# EAGLE board CPU-001 (EAGLE 9.5.2)
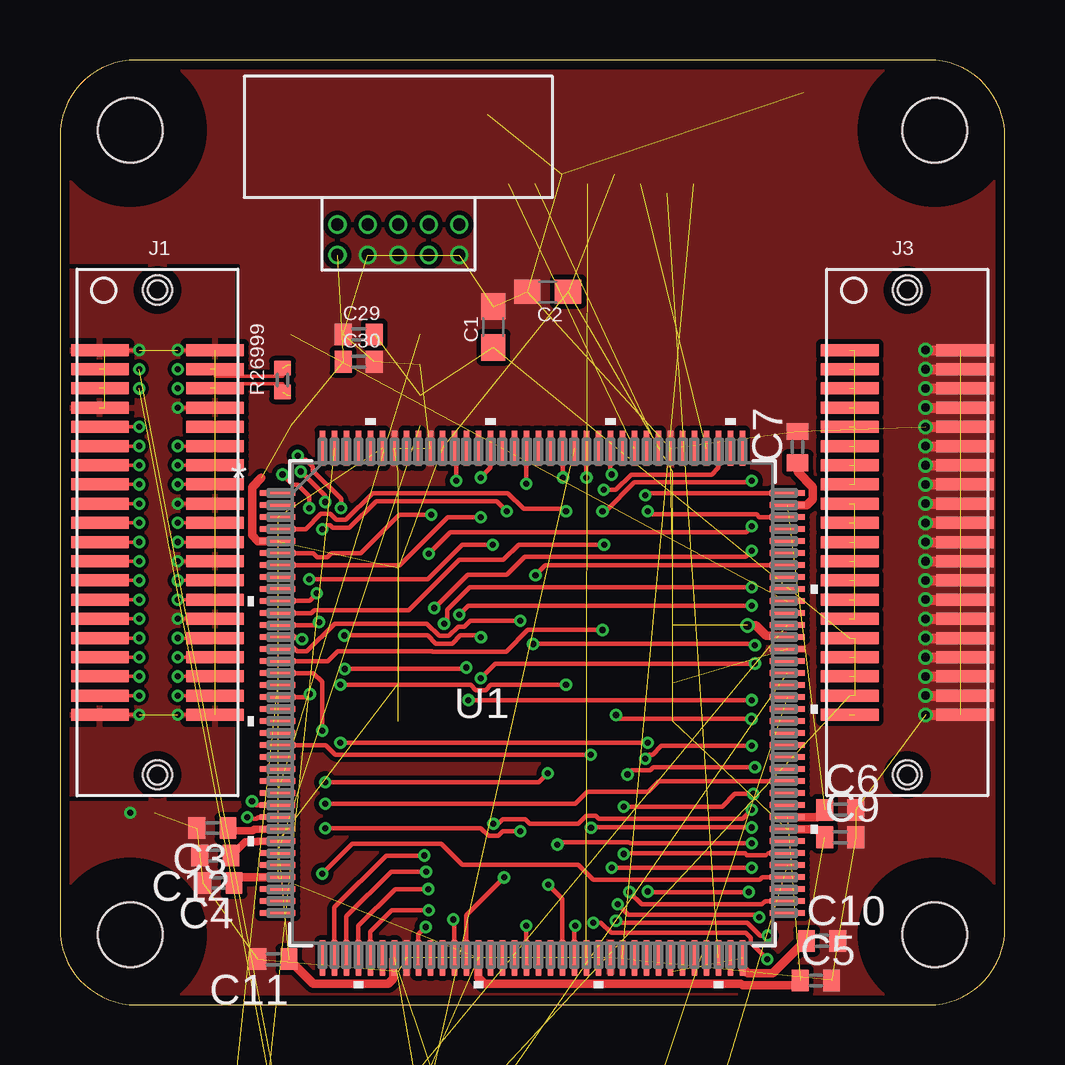
[diagram p0: board, top side]
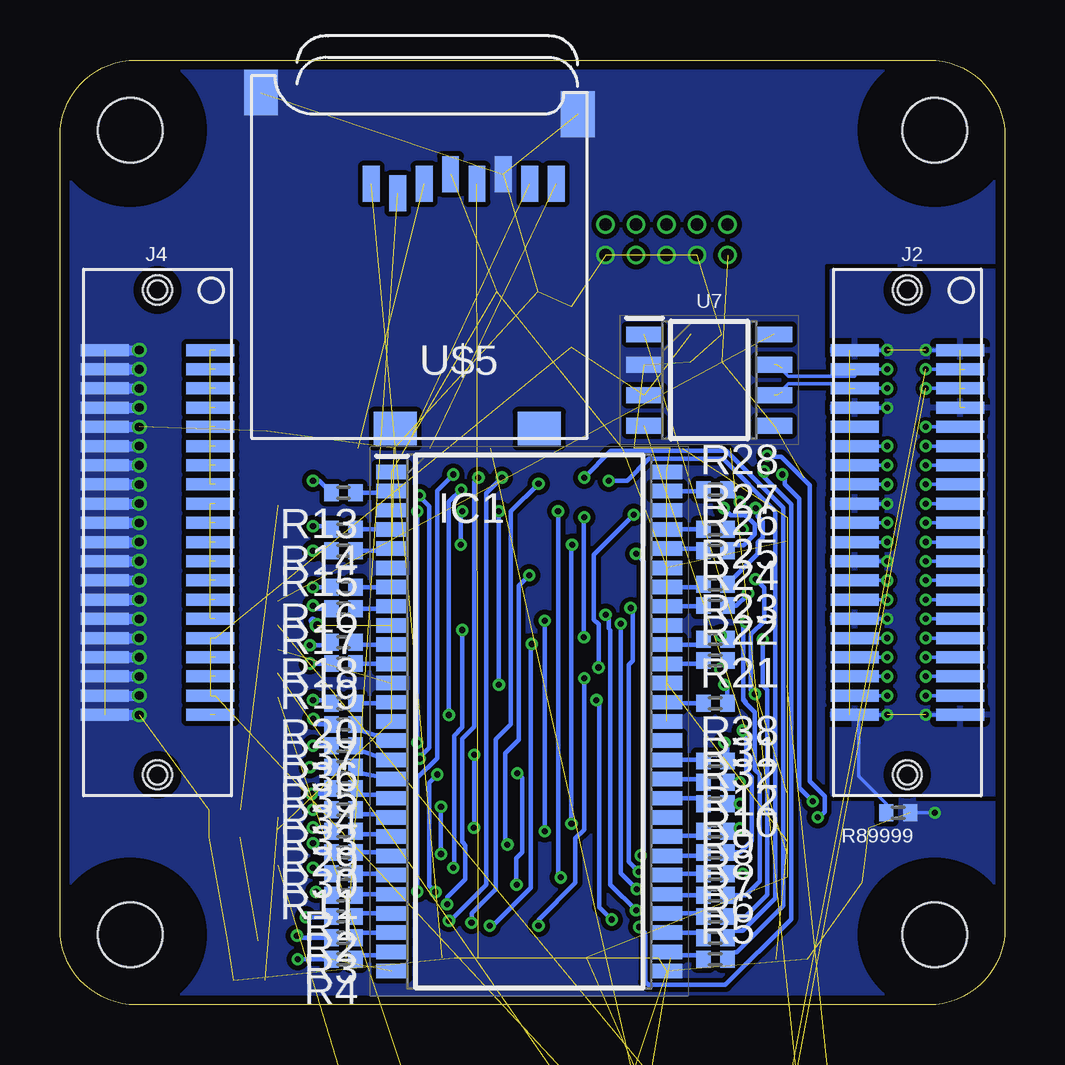
[diagram p1: board, bottom side, seen from below]

Size 39.37 x 39.37 mm. Coordinates in mm from the lower left corner, seen from the top.
Outline: 0,36.2 0,3.17 arc90 3.17,0 36.2,0 arc90 39.37,3.17 39.37,36.2 arc90 36.2,39.37 3.17,39.37 arc90 0,36.2
Copper layers (1*16): Top 0.035559375mm / dielectric 1.6mm / Bottom 0.035559375mm
Design rules "oshpark-2layer *": minimum track width 6mil, minimum drill 10mil, track to track 6mil, track to pad 6mil, pad to pad 6mil, via to via 6mil, smd to smd 0mil, copper to edge 15mil, drill to drill 6mil, minimum pad ring 5mil, minimum via ring 5mil, stop-mask expansion 2.5mil, vias tented up to drill 10mil, thermal gap 10mil
Holes 2.69 mm at 2.92,36.45 36.45,36.45 36.45,2.92 2.92,2.92
tRestrict: area 33.5,0 to 39.4,5.8; area 0,0 to 5.8,5.8; area 0,33.5 to 5.8,39.4; area 33.5,33.5 to 39.4,39.4
bRestrict: area 33.5,0 to 39.4,5.8; area 0,0 to 5.8,5.8; area 0,33.5 to 5.8,39.4; area 33.5,33.5 to 39.4,39.4
vRestrict: area 31.7,0 to 38.1,6.3; area 0,0 to 6.3,6.3; area 0,31.7 to 6.3,38.1; area 31.7,31.7 to 38.1,38.1

## Footprints (pad centres in the part's own frame; a part is rotated, then mirrored left to right if it is on the bottom)
C0603 = smd 1.1 x 1: 1 -0.85,0; 2 0.85,0
C0402 = smd 0.7 x 0.9: 1 -0.65,0; 2 0.65,0
C0805 = smd 1.3 x 1.5: 1 -0.95,0; 2 0.95,0
0603-POLAR = smd 1.1 x 1: + 0.85,0; - -0.85,0
SOP80P1176X120-54N = smd 1.295 x 0.6: 1 -5.728,10.4; 2 -5.728,9.6; 3 -5.728,8.8; 4 -5.728,8; 5 -5.728,7.2; 6 -5.728,6.4; 7 -5.728,5.6; 8 -5.728,4.8; 9 -5.728,4; 10 -5.728,3.2; 11 -5.728,2.4; 12 -5.728,1.6; 13 -5.728,0.8; 14 -5.728,0; 15 -5.728,-0.8; 16 -5.728,-1.6; 17 -5.728,-2.4; 18 -5.728,-3.2; 19 -5.728,-4; 20 -5.728,-4.8; 21 -5.728,-5.6; 22 -5.728,-6.4; 23 -5.728,-7.2; 24 -5.728,-8; 25 -5.728,-8.8; 26 -5.728,-9.6; 27 -5.728,-10.4; 28 5.728,-10.4; 29 5.728,-9.6; 30 5.728,-8.8; 31 5.728,-8; 32 5.728,-7.2; 33 5.728,-6.4; 34 5.728,-5.6; 35 5.728,-4.8; 36 5.728,-4; 37 5.728,-3.2; 38 5.728,-2.4; 39 5.728,-1.6; 40 5.728,-0.8; 41 5.728,0; 42 5.728,0.8; 43 5.728,1.6; 44 5.728,2.4; 45 5.728,3.2; 46 5.728,4; 47 5.728,4.8; 48 5.728,5.6; 49 5.728,6.4; 50 5.728,7.2; 51 5.728,8; 52 5.728,8.8; 53 5.728,9.6; 54 5.728,10.4
SOT223 = smd 1.5 x 2: 1 -2.3,-3.15; 2 0,-3.15; 3 2.3,-3.15 | smd 3.8 x 2: 4 0,3.15
SOT95P280X100-5N = smd 1.05 x 0.55: 1 -1.3,0.95; 2 -1.3,0; 3 -1.3,-0.95; 4 1.3,-0.95; 5 1.3,0.95
10144517-042802LF = smd 0.5 x 2.4: 1 7.6,2.4; 2 7.6,-2.4; 3 6.8,2.4; 4 6.8,-2.4; 5 6,2.4; 6 6,-2.4; 7 5.2,2.4; 8 5.2,-2.4; 9 4.4,2.4; 10 4.4,-2.4; 11 3.6,2.4; 12 3.6,-2.4; 13 2.8,2.4; 14 2.8,-2.4; 15 2,2.4; 16 2,-2.4; 17 1.2,2.4; 18 1.2,-2.4; 19 0.4,2.4; 20 0.4,-2.4; 21 -0.4,2.4; 22 -0.4,-2.4; 23 -1.2,2.4; 24 -1.2,-2.4; 25 -2,2.4; 26 -2,-2.4; 27 -2.8,2.4; 28 -2.8,-2.4; 29 -3.6,2.4; 30 -3.6,-2.4; 31 -4.4,2.4; 32 -4.4,-2.4; 33 -5.2,2.4; 34 -5.2,-2.4; 35 -6,2.4; 36 -6,-2.4; 37 -6.8,2.4; 38 -6.8,-2.4; 39 -7.6,2.4; 40 -7.6,-2.4 | hole 1.2: 10.1,0 | hole 0.8: -10.1,0
10144518-041802LF = smd 0.5 x 2: 1 -7.6,2.2; 2 -7.6,-2.2; 3 -6.8,2.2; 4 -6.8,-2.2; 5 -6,2.2; 6 -6,-2.2; 7 -5.2,2.2; 8 -5.2,-2.2; 9 -4.4,2.2; 10 -4.4,-2.2; 11 -3.6,2.2; 12 -3.6,-2.2; 13 -2.8,2.2; 14 -2.8,-2.2; 15 -2,2.2; 16 -2,-2.2; 17 -1.2,2.2; 18 -1.2,-2.2; 19 -0.4,2.2; 20 -0.4,-2.2; 21 0.4,2.2; 22 0.4,-2.2; 23 1.2,2.2; 24 1.2,-2.2; 25 2,2.2; 26 2,-2.2; 27 2.8,2.2; 28 2.8,-2.2; 29 3.6,2.2; 30 3.6,-2.2; 31 4.4,2.2; 32 4.4,-2.2; 33 5.2,2.2; 34 5.2,-2.2; 35 6,2.2; 36 6,-2.2; 37 6.8,2.2; 38 6.8,-2.2; 39 7.6,2.2; 40 7.6,-2.2 | hole 1.2: 10.1,0 | hole 0.8: -10.1,0
2X5_RIGHT = drill 0.508: 1 2.54,0; 2 2.54,-1.27; 3 1.27,0; 4 1.27,-1.27; 5 0,0; 6 0,-1.27; 7 -1.27,0; 8 -1.27,-1.27; 9 -2.54,0; 10 -2.54,-1.27
0603 = smd 1.1 x 1: 1 -0.85,0; 2 0.85,0
R0402 = smd 0.6 x 0.7: 1 -0.5,0; 2 0.5,0
LQFP144_20X20MC = smd 1.473 x 0.229: 1 -10.617,8.75; 2 -10.617,8.25; 3 -10.617,7.75; 4 -10.617,7.25; 5 -10.617,6.75; 6 -10.617,6.25; 7 -10.617,5.75; 8 -10.617,5.25; 9 -10.617,4.75; 10 -10.617,4.25; 11 -10.617,3.75; 12 -10.617,3.25; 13 -10.617,2.75; 14 -10.617,2.25; 15 -10.617,1.75; 16 -10.617,1.25; 17 -10.617,0.75; 18 -10.617,0.25; 19 -10.617,-0.25; 20 -10.617,-0.75; 21 -10.617,-1.25; 22 -10.617,-1.75; 23 -10.617,-2.25; 24 -10.617,-2.75; 25 -10.617,-3.25; 26 -10.617,-3.75; 27 -10.617,-4.25; 28 -10.617,-4.75; 29 -10.617,-5.25; 30 -10.617,-5.75; 31 -10.617,-6.25; 32 -10.617,-6.75; 33 -10.617,-7.25; 34 -10.617,-7.75; 35 -10.617,-8.25; 36 -10.617,-8.75; 73 10.617,-8.75; 74 10.617,-8.25; 75 10.617,-7.75; 76 10.617,-7.25; 77 10.617,-6.75; 78 10.617,-6.25; 79 10.617,-5.75; 80 10.617,-5.25; 81 10.617,-4.75; 82 10.617,-4.25; 83 10.617,-3.75; 84 10.617,-3.25; 85 10.617,-2.75; 86 10.617,-2.25; 87 10.617,-1.75; 88 10.617,-1.25; 89 10.617,-0.75; 90 10.617,-0.25; 91 10.617,0.25; 92 10.617,0.75; 93 10.617,1.25; 94 10.617,1.75; 95 10.617,2.25; 96 10.617,2.75; 97 10.617,3.25; 98 10.617,3.75; 99 10.617,4.25; 100 10.617,4.75; 101 10.617,5.25; 102 10.617,5.75; 103 10.617,6.25; 104 10.617,6.75; 105 10.617,7.25; 106 10.617,7.75; 107 10.617,8.25; 108 10.617,8.75 | smd 0.229 x 1.473: 37 -8.75,-10.617; 38 -8.25,-10.617; 39 -7.75,-10.617; 40 -7.25,-10.617; 41 -6.75,-10.617; 42 -6.25,-10.617; 43 -5.75,-10.617; 44 -5.25,-10.617; 45 -4.75,-10.617; 46 -4.25,-10.617; 47 -3.75,-10.617; 48 -3.25,-10.617; 49 -2.75,-10.617; 50 -2.25,-10.617; 51 -1.75,-10.617; 52 -1.25,-10.617; 53 -0.75,-10.617; 54 -0.25,-10.617; 55 0.25,-10.617; 56 0.75,-10.617; 57 1.25,-10.617; 58 1.75,-10.617; 59 2.25,-10.617; 60 2.75,-10.617; 61 3.25,-10.617; 62 3.75,-10.617; 63 4.25,-10.617; 64 4.75,-10.617; 65 5.25,-10.617; 66 5.75,-10.617; 67 6.25,-10.617; 68 6.75,-10.617; 69 7.25,-10.617; 70 7.75,-10.617; 71 8.25,-10.617; 72 8.75,-10.617; 109 8.75,10.617; 110 8.25,10.617; 111 7.75,10.617; 112 7.25,10.617; 113 6.75,10.617; 114 6.25,10.617; 115 5.75,10.617; 116 5.25,10.617; 117 4.75,10.617; 118 4.25,10.617; 119 3.75,10.617; 120 3.25,10.617; 121 2.75,10.617; 122 2.25,10.617; 123 1.75,10.617; 124 1.25,10.617; 125 0.75,10.617; 126 0.25,10.617; 127 -0.25,10.617; 128 -0.75,10.617; 129 -1.25,10.617; 130 -1.75,10.617; 131 -2.25,10.617; 132 -2.75,10.617; 133 -3.25,10.617; 134 -3.75,10.617; 135 -4.25,10.617; 136 -4.75,10.617; 137 -5.25,10.617; 138 -5.75,10.617; 139 -6.25,10.617; 140 -6.75,10.617; 141 -7.25,10.617; 142 -7.75,10.617; 143 -8.25,10.617; 144 -8.75,10.617
SOIC127P600X175-8N = smd 1.5 x 0.65: 1 -2.7,1.905; 2 -2.7,0.635; 3 -2.7,-0.635; 4 -2.7,-1.905; 5 2.7,-1.905; 6 2.7,-0.635; 7 2.7,0.635; 8 2.7,1.905
PSON65P250X200X100-8N = smd 0.46 x 0.49: 1 -0.975,0.72; 2 -0.325,0.72; 3 0.325,0.72; 4 0.975,0.72; 5 0.975,-0.72; 6 0.325,-0.72; 7 -0.325,-0.72; 8 -0.975,-0.72
PCA9306DC = smd 0.25 x 0.602: 1 -0.73,-1.446; 2 -0.23,-1.446; 3 0.27,-1.446; 4 0.77,-1.446; 5 0.77,1.431; 6 0.27,1.431; 7 -0.23,1.431; 8 -0.73,1.431
MICROSD_ = smd 0.7 x 1.5: 1 9,-10.64; 2 7.9,-10.24; 3 6.8,-10.64; 4 5.7,-11.04; 5 4.6,-10.64; 6 3.5,-11.04; 7 2.4,-10.64; 8 1.3,-10.64 | smd 1.8 x 1.4: CD1 2,-0.44; CD2 8,-0.44 | smd 1.4 x 1.9: MT1 0.4,-13.54; MT2 13.6,-14.44

## Placement (x,y rotation side)
C1  1uF  [C0603]  18.06,28.24 90 top
C2  1uF  [C0603]  20.32,29.72 180 top
C3  100n  [C0402]  6.35,7.37 180 top
C4  100n  [C0402]  6.6,5.08 180 top
C5  100n  [C0402]  31.5,1.02 0 top
C6  100n  [C0402]  32.51,8.13 0 top
C7  100n  [C0402]  30.73,23.24 90 top
C8  4.7u  [C0805]  16.89,-9.78 0 top  (outside the outline)
C9  100n  [C0402]  32.51,6.99 0 top
C10  100n  [C0402]  31.75,2.67 0 top
C11  100n  [C0402]  8.89,1.91 180 top
C12  100n  [C0402]  6.48,6.22 180 top
C13  100n  [C0402]  1.52,-50.55 0 top  (outside the outline)
C14  100n  [C0402]  1.52,-55.5 0 top  (outside the outline)
C15  4.7u  [C0805]  -0.38,-82.42 0 top  (outside the outline)
C16  4.7u  [C0805]  -0.38,-88.65 0 top  (outside the outline)
C17  100n  [C0402]  -0.89,-94.23 0 top  (outside the outline)
C18  100nF  [C0402]  1.52,-25.78 0 top  (outside the outline)
C19  100nF  [C0402]  8,-25.78 0 top  (outside the outline)
C20  1u  [C0402]  1.52,-35.69 0 top  (outside the outline)
C21  4.7u  [C0805]  5.71,-30.73 0 top  (outside the outline)
C22  100n  [C0402]  1.52,-40.64 0 top  (outside the outline)
C23  10uF  [0603-POLAR]  -0.51,-98.42 0 top  (outside the outline)
C24  10uF  [0603-POLAR]  -15.11,-101.73 0 top  (outside the outline)
C25  100nF  [C0402]  -15.37,-111.25 0 top  (outside the outline)
C26  1uF  [C0402]  -15.37,-116.2 0 top  (outside the outline)
C27  1uF  [C0402]  -11.18,-116.2 0 top  (outside the outline)
C28  100nF  [C0402]  -8.89,-111.25 0 top  (outside the outline)
C29  100nF  [C0402]  12.45,27.94 180 top
C30  100nF  [C0402]  12.45,26.8 0 top
IC1  IS42S16800F-7TL  [SOP80P1176X120-54N]  19.81,11.81 0 bottom
IC2  NCV1117ST33T3G  [SOT223]  -13.59,-95.76 0 top  (outside the outline)
IC3  TLV71318PQDBVRQ1  [SOT95P280X100-5N]  -8.26,-124.84 0 top  (outside the outline)
J1  10144517-042802LF  [10144517-042802LF]  4.06,19.68 90 top
J2  10144518-041802LF  [10144518-041802LF]  4.06,19.68 270 bottom
J3  10144517-042802LF  [10144517-042802LF]  35.31,19.68 90 top
J4  10144518-041802LF  [10144518-041802LF]  35.31,19.68 270 bottom
J6  2X5_0.05_SWD  [2X5_RIGHT]  14.1,31.24 180 top
L1  470@100MHz  [0603]  1.78,-59.69 0 top  (outside the outline)
L2  470@100MHz  [0603]  0.64,-71.5 0 top  (outside the outline)
R1  22R  [R0402]  27.56,4.57 180 bottom
R2  22R  [R0402]  27.56,3.68 180 bottom
R3  22R  [R0402]  27.56,2.79 180 bottom
R4  22R  [R0402]  27.56,1.91 180 bottom
R5  22R  [R0402]  12.06,1.91 0 bottom
R6  22R  [R0402]  12.06,2.79 0 bottom
R7  22R  [R0402]  12.06,3.68 0 bottom
R8  22R  [R0402]  12.06,4.57 0 bottom
R9  22R  [R0402]  12.06,5.46 0 bottom
R10  22R  [R0402]  12.06,6.35 0 bottom
R11  22R  [R0402]  27.56,5.46 180 bottom
R12  22R  [R0402]  12.06,7.24 0 bottom
R13  22R  [R0402]  27.56,21.34 180 bottom
R14  22R  [R0402]  27.56,19.81 180 bottom
R15  22R  [R0402]  27.56,18.92 180 bottom
R16  22R  [R0402]  27.56,17.4 180 bottom
R17  22R  [R0402]  27.56,16.51 180 bottom
R18  22R  [R0402]  27.56,15.11 180 bottom
R19  22R  [R0402]  27.56,14.22 180 bottom
R20  22R  [R0402]  27.56,12.57 180 bottom
R21  22R  [R0402]  12.06,12.57 0 bottom
R22  22R  [R0402]  12.06,14.35 0 bottom
R23  22R  [R0402]  12.06,15.24 0 bottom
R24  22R  [R0402]  12.06,16.64 0 bottom
R25  22R  [R0402]  12.06,17.53 0 bottom
R26  22R  [R0402]  12.06,18.92 0 bottom
R27  22R  [R0402]  12.06,19.81 0 bottom
R28  22R  [R0402]  12.06,21.46 0 bottom
R29  22R  [R0402]  27.56,7.24 180 bottom
R30  22R  [R0402]  27.56,6.35 180 bottom
R31  22R  [R0402]  12.06,9.27 0 bottom
R32  22R  [R0402]  12.06,8.38 0 bottom
R33  22R  [R0402]  27.56,8.13 180 bottom
R34  22R  [R0402]  27.56,9.02 180 bottom
R35  22R  [R0402]  27.56,9.91 180 bottom
R36  22R  [R0402]  27.56,10.79 180 bottom
R37  22R  [R0402]  27.56,11.68 180 bottom
R38  22R  [R0402]  12.06,10.16 0 bottom
R39  120 DNP  [R0402]  1.14,-20.83 0 top  (outside the outline)
R40  [R0402]  0,-68.71 0 top  (outside the outline)
R41  10k  [R0402]  -7.37,-116.2 0 top  (outside the outline)
R42  10k  [R0402]  -3.3,-116.2 0 top  (outside the outline)
R43  [R0402]  -11.43,-121.16 0 top  (outside the outline)
R44  [R0402]  -7.37,-121.16 0 top  (outside the outline)
R45  200k  [R0402]  -2.79,-111.25 0 top  (outside the outline)
R26999  120 DNP  [R0402]  9.27,26.04 90 top
R89999  [R0402]  4.45,8 0 bottom
U1  ATSAMV71Q19B-AABT  [LQFP144_20X20MC]  19.68,12.57 0 top
U2  ATA6561-GAQW-N  [SOIC127P600X175-8N]  8.51,-15.62 0 top  (outside the outline)
U3  ICP-10111  [PSON65P250X200X100-8N]  -4.06,-105.79 0 top  (outside the outline)
U4  PCA9306  [PCA9306DC]  -14.73,-121.28 0 top  (outside the outline)
U7  ATA6561-GAQW-N  [SOIC127P600X175-8N]  12.32,26.04 0 bottom
U$5  MICROSD  [MICROSD_]  17.4,23.57 180 bottom

## Library data of the parts
C1-C22 C25-C30 = rcl; SPICEPREFIX: C
C23 C24 = SparkFun-Capacitors; PROD_ID: CAP-13210
IC1 = SamacSys Managed; DESCRIPTION: ISSI IS42S16800F-7TL, SDRAM 128Mbit Surface Mount, 143MHz, 3 3.6 V, 54-Pin TSOP; HEIGHT: 1.2mm; MANUFACTURER_NAME: Integrated Silicon Solution Inc.; MANUFACTURER_PART_NUMBER: IS42S16800F-7TL; MOUSER_PART_NUMBER: 870-IS42S16800F-7TL; MOUSER_PRICE-STOCK: https://www.mouser.com/Search/Refine.aspx?Keyword=870-IS42S16800F-7TL
IC2 = v-reg
IC3 = SamacSys_Parts; DESCRIPTION: 300 MA LOW IQ, WIDE INPUT; HEIGHT: 1mm; MANUFACTURER_NAME: ON Semiconductor; MANUFACTURER_PART_NUMBER: NCP718BSN180T1G; MOUSER_PART_NUMBER: 863-NCP718BSN180T1G
J1-J4 = BergStak
J6 = Headers
L1 L2 = SparkFun-Coils; PROD_ID: NDUC-07874
R1-R45 R26999 R89999 = rcl; SPICEPREFIX: R
U1 = ATSAM; MANUFACTURER_PART_NUMBER: ATSAMV71Q19BAABT; VENDOR: Microchip
U2 U7 = SamacSys Managed; DESCRIPTION: MICROCHIP - ATA6561-GAQW-N - CAN TRANSCEIVER, 5MBPS, -40 TO 150DEG C; HEIGHT: 1.75mm; MANUFACTURER_NAME: Microchip; MANUFACTURER_PART_NUMBER: ATA6561-GAQW-N; MOUSER_PART_NUMBER: 579-ATA6561-GAQW-N; MOUSER_PRICE-STOCK: https://www.mouser.com/Search/Refine.aspx?Keyword=579-ATA6561-GAQW-N
U3 = ICP-10111; DIGI-KEY_PART_NUMBER: 1428-1145-1-ND; DIGI-KEY_PURCHASE_URL: https://www.digikey.com/product-detail/en/tdk-invensense/ICP-10111/1428-1145-1-ND/9555757?utm_source=snapeda&utm_medium=aggregator&utm_campaign=symbol; MF: TDK InvenSense; MP: ICP-10111; PACKAGE: PSON-8 TDK-InvenSense
U4 = SparkFun-IC-Comms; PROD_ID: IC-10023
U$5 = Connectors

## Nets
+1.8V: C25.1 C27.1 IC3.4 IC3.5 R41.2 R42.2 U3.8 U4.1
+3V3: C2.1 C8.1 C9.1 C10.1 C11.1 C12.1 C13.1 C14.1 C19.1 C21.1 C23.+ C26.1 C30.1 IC1.1 IC1.3 IC1.9 IC1.14 IC1.27 IC1.43 IC1.49 IC2.4 IC3.1 IC3.3 J6.1 R40.1 R43.2 R44.2 R45.1 U1.5 U1.30 U1.43 U1.72 U1.80 U1.96 U1.134 U2.5 U7.5 U$5.4
+5V: C1.1 C18.1 C24.+ C29.1 IC2.3 J3.31 J3.33 J3.35 J3.37 J4.31 J4.33 J4.35 J4.37 U2.3 U7.3
+12V: J3.17 J3.19 J3.21 J3.23 J3.25 J3.27 J3.29 J4.17 J4.19 J4.21 J4.23 J4.25 J4.27 J4.29
+V_BAT: J3.1 J3.3 J3.5 J3.7 J3.9 J3.11 J3.13 J3.15 J4.1 J4.3 J4.5 J4.7 J4.9 J4.11 J4.13 J4.15
A0: IC1.23 R1.1
A1: IC1.24 R2.1
A2: IC1.25 R3.1
A3: IC1.26 R4.1
A4: IC1.29 R5.1
A5: IC1.30 R6.1
A6: IC1.31 R7.1
A7: IC1.32 R8.1
A8: IC1.33 R9.1
A9: IC1.34 R10.1
A10: IC1.22 R11.1
A11: IC1.35 R12.1
BA0: IC1.20 R29.1
BA1: IC1.21 R30.1
CAN0_N: J1.6 J2.6 R26999.1 U7.6
CAN0_P: J1.4 J2.4 R26999.2 U7.7
CAN1_N: J1.5 J2.5 R39.1 U2.6
CAN1_P: J1.3 J2.3 R39.2 U2.7
CAS: IC1.17 R35.1
CDCK: IC1.38 R31.1
CDCKE: IC1.37 R32.1
CDCS: IC1.19 R33.1
DETECT_A: J1.10
DETECT_B: J2.10
DQ0: IC1.2 R13.1
DQ1: IC1.4 R14.1
DQ2: IC1.5 R15.1
DQ3: IC1.7 R16.1
DQ4: IC1.8 R17.1
DQ5: IC1.10 R18.1
DQ6: IC1.11 R19.1
DQ7: IC1.13 R20.1
DQ8: IC1.42 R21.1
DQ9: IC1.44 R22.1
DQ10: IC1.45 R23.1
DQ11: IC1.47 R24.1
DQ12: IC1.48 R25.1
DQ13: IC1.50 R26.1
DQ14: IC1.51 R27.1
DQ15: IC1.53 R28.1
DQMH: IC1.39 R38.1
DQML: IC1.15 R37.1
ETH_RX+: J1.36 J2.36
ETH_RX-: J1.38 J2.38
ETH_TX+: J1.32 J2.32
ETH_TX-: J1.34 J2.34
GND: C1.2 C2.2 C3.2 C4.2 C5.2 C6.2 C7.2 C8.2 C9.2 C10.2 C11.2 C12.2 C13.2 C14.2 C15.2 C16.2 C17.2 C18.2 C19.2 C20.2 C21.2 C22.2 C23.- C24.- C25.2 C26.2 C27.2 C28.2 C29.2 C30.2 IC1.6 IC1.12 IC1.28 IC1.41 IC1.46 IC1.52 IC1.54 IC2.1 IC3.2 J3.2 J3.4 J3.6 J3.8 J3.10 J3.12 J3.14 J3.16 J3.18 J3.20 J3.22 J3.24 J3.26 J3.28 J3.30 J3.32 J3.34 J3.36 J3.38 J3.40 J4.2 J4.4 J4.6 J4.8 J4.10 J4.12 J4.14 J4.16 J4.18 J4.20 J4.22 J4.24 J4.26 J4.28 J4.30 J4.32 J4.34 J4.36 J4.38 J4.40 J6.3 J6.5 J6.9 R89999.2 U1.44 U1.61 U1.95 U1.115 U1.135 U1.138 U2.2 U3.1 U3.2 U3.5 U3.6 U3.7 U4.4 U7.2 U$5.6 U$5.MT1 U$5.MT2
I2C_SCL: J1.22 J2.22
I2C_SDA: J1.20 J2.20
N$1: C28.1 R45.2 U4.7 U4.8
N$4: L2.1 R40.2
P_GOOD: J3.39 J4.39
PA0: R30.2 U1.102
PA1: U1.99 U7.8
PA2: U1.93 U2.8
PA3: R43.1 U1.91 U4.5
PA4: R44.1 U1.77 U4.6
PA5: U1.73
PA6: U1.114
PA7: U1.35
PA8: U1.36
PA9: U1.75
PA10: U1.66
PA11: U1.64
PA12: U1.68
PA13: U1.42
PA14: U1.51
PA15: R27.2 U1.49
PA16: R28.2 U1.45
PA17: U1.25
PA18: U1.24
PA19: U1.23
PA20: R29.2 U1.22
PA21: U1.32
PA22: U1.37
PA23: U1.46
PA24: U1.56
PA25: U1.59 U$5.5
PA26: U1.62 U$5.1
PA27: U1.70 U$5.2
PA28: U1.112 U$5.3
PA29: U1.129
PA30: U1.116 U$5.7
PA31: U1.118 U$5.8
PB0: U1.21
PB1: U1.20
PB2: U1.26 U7.1
PB3: U1.31 U7.4
PB4: U1.105
PB5: U1.109
PB6: U1.79
PB7: U1.89
PB8: U1.141
PB9: U1.142
PB12: U1.87
PB13: U1.144
PC0: R13.2 U1.11
PC1: R14.2 U1.38
PC2: R15.2 U1.39
PC3: R16.2 U1.40
PC4: R17.2 U1.41
PC5: R18.2 U1.58
PC6: R19.2 U1.54
PC7: R20.2 U1.48
PC8: U1.82
PC9: U1.86
PC10: U1.90
PC11: U1.94
PC12: U1.17 U2.4
PC13: U1.19
PC14: U1.97 U2.1
PC15: R33.2 U1.18
PC16: U1.100
PC17: U1.103
PC18: R37.2 U1.111
PC19: U1.117
PC20: R1.2 U1.120
PC21: R2.2 U1.122
PC22: R3.2 U1.124
PC23: R4.2 U1.127
PC24: R5.2 U1.130
PC25: R6.2 U1.133
PC26: R7.2 U1.13
PC27: R8.2 U1.12
PC28: R9.2 U1.76
PC29: R10.2 U1.16
PC30: R11.2 U1.15
PC31: R12.2 U1.14
PD0: U1.1
PD1: U1.132
PD2: U1.131
PD3: U1.128
PD4: U1.126
PD5: U1.125
PD6: U1.121
PD7: U1.119
PD8: U1.113
PD9: U1.110
PD10: U1.101
PD11: U1.98
PD12: U1.92
PD13: U1.88
PD14: R32.2 U1.84
PD15: R38.2 U1.106
PD16: R34.2 U1.78
PD17: R35.2 U1.74
PD18: U1.69
PD19: U1.67
PD20: U1.65
PD21: U1.63
PD22: U1.60
PD23: R31.2 U1.57
PD24: U1.55
PD25: U1.52
PD26: U1.53
PD27: U1.47
PD28: U1.71
PD29: R36.2 U1.108
PD30: U1.34
PD31: U1.2
PE0: R21.2 U1.4
PE1: R22.2 U1.6
PE2: R23.2 U1.7
PE3: R24.2 U1.10
PE4: R25.2 U1.27
PE5: R26.2 U1.28
RAS: IC1.18 R34.1
RESET: J6.10
RFU_9: J1.9 J2.9
RFU_11: J1.11 J2.11
RFU_13: J1.13 J2.13
RFU_15: J1.15 J2.15
RFU_17: J1.17 J2.17
RFU_19: J1.19 J2.19
RFU_21: J1.21 J2.21
RFU_23: J1.23 J2.23
RFU_25: J1.25 J2.25
RFU_27: J1.27 J2.27
RFU_29: J1.29 J2.29
RFU_31: J1.31 J2.31
RFU_33: J1.33 J2.33
RFU_35: J1.35 J2.35
RFU_37: J1.37 J2.37
RS485_D+: J1.26 J2.26
RS485_D-: J1.28 J2.28
SCL0_1V8: R42.1 U3.4 U4.2
SDA0_1V8: R41.1 U3.3 U4.3
SDWE: IC1.16 R36.1
SHIELD: J1.1 J1.2 J1.7 J1.8 J1.18 J1.24 J1.30 J1.39 J1.40 J2.1 J2.2 J2.7 J2.8 J2.18 J2.24 J2.30 J2.39 J2.40 R89999.1
SPI_MISO: J1.12 J2.12
SPI_MOSI: J1.14 J2.14
SPI_SCK: J1.16 J2.16
SWCLK: J6.4
SWDIO: J6.2
VDDOUT: C3.1 C4.1 C5.1 C6.1 C7.1 C17.1 C20.1 C22.1 L1.1 U1.3 U1.29 U1.33 U1.50 U1.81 U1.107 U1.139
VDDPLL: C15.1 L1.2 U1.123
VDDPLLUSB: C16.1 L2.2 U1.143
VREFN: U1.8
VREFP: U1.9

## Tracks (layer width: path | path; a pad name or v marks a point on that pad's centre or on a via)
+1.8V  (7 unrouted)
+3V3  (via drill 0.35)  (33 unrouted)
  Top 0.305: U1.30 8.23,6.82 8.22,6.81 7.71,6.81 C12.1
  Top 0.356: U1.96 30.25,15.38 29.43,15.38 29,15.81 v28.65,15.81 | U1.80 31.52,7.32 C9.1 | U1.72 28.43,1.54 28.65,1.32 29.71,1.32 31.05,2.67 C10.1 | U1.43 13.88,1.9 13.88,1.08 13.69,0.89 10.56,0.89 C11.1 | U1.5 8.24,19.32 8,19.56 8,21.57 8.38,21.95
  Bottom 0.356: v28.65,15.81 28.84,16
+5V  (14 unrouted)
+12V  (13 unrouted)
+V_BAT  (15 unrouted)
A0
  Bottom 0.178: IC1.23 27.02,4.61 R1.1
A1
  Bottom 0.178: IC1.24 26.93,3.81 R2.1
A2
  Bottom 0.178: IC1.25 26.84,3.01 R3.1
A3
  Bottom 0.178: IC1.26 25.54,2.08 25.55,2.08 26.89,2.08 R4.1
A4
  Bottom 0.178: IC1.29 14.08,2.08 12.74,2.08 R5.1
A5
  Bottom 0.178: IC1.30 12.78,3.01 R6.1
A6
  Bottom 0.178: IC1.31 12.69,3.81 R7.1
A7
  Bottom 0.178: IC1.32 14.04,4.57 R8.1
A8
  Bottom 0.178: IC1.33 14.03,5.46 R9.1
A9
  Bottom 0.178: R10.1 12.7,6.21 IC1.34
A10
  Bottom 0.178: IC1.22 25.59,5.46 R11.1
A11
  Bottom 0.178: R12.1 12.76,7.04 14.05,7.04 IC1.35
BA0
  Bottom 0.178: IC1.20 25.64,7.11 26.93,7.11 R29.1
BA1
  Bottom 0.178: IC1.21 25.68,6.35 R30.1
CAN0_N  (via drill 0.25)  (3 unrouted)
  Top 0.152: J1.6 6.46,25.88 9.27,25.88
  Bottom 0.152: 9.5,25.4 9.02,25.88 6.26,25.88 J2.6 v4.9,25.68
CAN0_P  (via drill 0.25)  (3 unrouted)
  Top 0.152: J1.4 6.46,26.19 9.27,26.19
  Bottom 0.152: 9.5,26.67 9.02,26.19 6.26,26.19 J2.4 v4.9,26.48
CAN1_N  (via drill 0.25)  (3 unrouted)
  Bottom 0.152: J2.5 v3.3,25.68
CAN1_P  (via drill 0.25)  (3 unrouted)
  Bottom 0.152: J2.3 v3.3,26.48
CAS
  Bottom 0.178: IC1.17 27.03,9.7 R35.1
CDCK
  Bottom 0.178: R31.1 12.71,9.41 IC1.38
CDCKE
  Bottom 0.178: IC1.37 12.79,8.61 R32.1
CDCS
  Bottom 0.178: IC1.19 25.67,7.94 26.87,7.94 R33.1
DQ0
  Bottom 0.178: R13.1 25.61,21.34 IC1.2
DQ1
  Bottom 0.178: R14.1 IC1.4
DQ2
  Bottom 0.178: R15.1 25.63,18.92 IC1.5
DQ3
  Bottom 0.178: IC1.7 25.55,17.4 R16.1
DQ4
  Bottom 0.178: IC1.8 25.64,16.51 R17.1
DQ5
  Bottom 0.178: R18.1 26.96,15.01 IC1.10
DQ6
  Bottom 0.178: IC1.11 25.55,14.22 R19.1
DQ7
  Bottom 0.178: IC1.13 25.58,12.57 R20.1
DQ8
  Bottom 0.178: IC1.42 14.05,12.57 R21.1
DQ9
  Bottom 0.178: IC1.44 12.71,14.21 R22.1
DQ10
  Bottom 0.178: IC1.45 12.79,15.01 R23.1
DQ11
  Bottom 0.178: IC1.47 12.59,16.61 R24.1
DQ12
  Bottom 0.178: IC1.48 12.68,17.41 R25.1
DQ13
  Bottom 0.178: IC1.50 12.65,19.01 R26.1
DQ14
  Bottom 0.178: IC1.51 R27.1
DQ15
  Bottom 0.178: IC1.53 12.62,21.41 R28.1
DQMH
  Bottom 0.178: IC1.39 12.62,10.21 R38.1
DQML
  Bottom 0.178: IC1.15 26.8,11.43 26.81,11.44 R37.1
ETH_RX+  (via drill 0.25)
  Top 0.152: v4.9,13.69 J1.36
  Bottom 0.152: J2.36 v4.9,13.69
ETH_RX-  (via drill 0.25)
  Top 0.152: v4.9,12.88 J1.38
  Bottom 0.152: J2.38 v4.9,12.88
ETH_TX+  (via drill 0.25)
  Top 0.152: v4.9,15.29 J1.32
  Bottom 0.152: J2.32 v4.9,15.29
ETH_TX-  (via drill 0.25)
  Top 0.152: v4.9,14.48 J1.34
  Bottom 0.152: J2.34 v4.9,14.48
GND  (via drill 0.25, 0.36)  (79 unrouted)
  Top 0.406: v36.07,27.29 J3.2 | v36.07,26.48 J3.4 | v36.07,25.68 J3.6 | v36.07,24.89 J3.8 | v36.07,14.48 J3.34 | v36.07,13.69 J3.36 | v36.07,12.88 J3.38 | v36.07,12.09 J3.40 | v36.07,17.68 J3.26 | v36.07,16.89 J3.28 | v36.07,16.09 J3.30 | v36.07,15.29 J3.32 | v36.07,20.89 J3.18 | v36.07,20.09 J3.20 | v36.07,19.29 J3.22 | v36.07,18.48 J3.24 | v36.07,24.09 J3.10 | v36.07,23.29 J3.12 | v36.07,22.48 J3.14 | v36.07,21.68 J3.16
  Bottom 0.152: R89999.2 v2.92,8
  Bottom 0.406: J4.2 v36.07,27.29 | J4.4 v36.07,26.48 | J4.6 v36.07,25.68 | J4.8 v36.07,24.89 | J4.34 v36.07,14.48 | J4.36 v36.07,13.69 | J4.38 v36.07,12.88 | J4.40 v36.07,12.09 | J4.26 v36.07,17.68 | J4.28 v36.07,16.89 | J4.30 v36.07,16.09 | J4.32 v36.07,15.29 | J4.18 v36.07,20.89 | J4.20 v36.07,20.09 | J4.22 v36.07,19.29 | J4.24 v36.07,18.48 | J4.10 v36.07,24.09 | J4.12 v36.07,23.29 | J4.14 v36.07,22.48 | J4.16 v36.07,21.68
  pour Bottom (isolate 0.203, rank 5, no thermals): 39.37,0 0,0 0,39.37 39.37,39.37
  pour Top (isolate 0.203, rank 5, no thermals): 0,0 39.37,0 39.37,39.37 0,39.37
I2C_SCL  (via drill 0.25)
  Top 0.152: v4.9,19.29 J1.22
  Bottom 0.152: J2.22 v4.9,19.29
I2C_SDA  (via drill 0.25)
  Top 0.152: v4.9,20.09 J1.20
  Bottom 0.152: J2.20 v4.9,20.09
N$1  (3 unrouted)
N$4  (1 unrouted)
P_GOOD  (1 unrouted)
PA0  (via drill 0.25)
  Top 0.178: v28.83,6.73 23.75,6.73 23.7,6.78 20.83,6.78 v20.73,6.68 | v19.81,17.91 20.23,18.32 U1.102
  Bottom 0.178: R30.2 28.45,6.35 v28.83,6.73 | v20.73,6.68 20.73,6.82 20.82,6.91 20.82,10.49 20.26,11.05 20.26,17.46 v19.81,17.91
PA1  (1 unrouted)
PA2  (1 unrouted)
PA3  (2 unrouted)
PA4  (2 unrouted)
PA15  (via drill 0.25)
  Top 0.178: v18.62,20.57 18.2,20.99 13.17,20.99 12.05,19.88 11.37,19.88 11.27,19.98 11.09,19.98 v10.92,19.81 | U1.49 16.93,3.74 v18.5,5.31
  Bottom 0.178: v18.62,20.57 18.62,5.42 v18.5,5.31 | v10.92,19.81 R27.2
PA16  (via drill 0.25)
  Top 0.178: v10.03,22.23 11.05,21.21 v11.05,20.95 | v15.24,3.25 14.94,2.94 U1.45
  Bottom 0.178: v11.05,20.95 v11.06,20.95 R28.2 | v10.03,22.23 10.03,21.98 8.9,20.85 8.9,3.58 11.65,0.83 14.86,0.83 14.99,0.96 14.99,2.99 v15.24,3.25
PA20  (via drill 0.25)
  Top 0.178: U1.22 11.08,10.82 11.48,10.43 v22.11,10.43 | v22.12,7.38 22.15,7.4 28.82,7.4 v28.83,7.39
  Bottom 0.178: v28.83,7.39 28.21,7.39 R29.2 | v22.11,10.43 22.11,7.39 v22.12,7.38
PA25  (1 unrouted)
PA26  (1 unrouted)
PA27  (1 unrouted)
PA28  (1 unrouted)
PA30  (1 unrouted)
PA31  (1 unrouted)
PB2  (1 unrouted)
PB3  (1 unrouted)
PC0  (via drill 0.25)
  Top 0.178: v22.61,20.57 22.74,20.57 23.94,21.77 28.75,21.77 v28.83,21.84 | U1.11 10.47,16.32 10.59,16.45 14.54,16.45 16.64,18.54 18.48,18.54 19.11,19.18 v22.67,19.18
  Bottom 0.178: v22.67,19.18 22.67,20.51 v22.61,20.57 | v28.83,21.84 28.57,21.84 R13.2
PC1  (via drill 0.25)
  Top 0.178: U1.38 11.44,4.06 13.59,6.22 v15.18,6.22 | v28.83,19.94 28.59,19.7 16.27,19.7 v15.37,18.8
  Bottom 0.178: R14.2 28.19,19.94 v28.83,19.94 | v15.18,6.22 15.05,6.35 15.05,18.48 v15.37,18.8
PC2  (via drill 0.25)
  Top 0.178: U1.39 11.94,3.68 13.8,5.54 v15.25,5.54 | v28.83,18.92 28.57,18.67 19.37,18.67 18.62,17.92 16.98,17.92 v15.6,16.54
  Bottom 0.178: v28.83,18.92 R15.2 | v15.6,16.54 15.65,16.48 15.51,16.33 15.51,14.34 15.67,14.17 15.67,5.96 v15.25,5.54
PC3  (via drill 0.25)
  Top 0.178: v28.83,17.4 17.08,17.4 16.14,16.46 16.14,16.02 v16,15.88 | U1.40 12.44,3.3 13.96,4.83 v15.34,4.83
  Bottom 0.178: R16.2 v28.83,17.4 | v15.34,4.83 16,5.49 v16,15.88
PC4  (via drill 0.25)
  Top 0.178: v28.83,16.64 17.02,16.64 v16.64,16.26 | U1.41 12.94,3.05 13.82,3.94 v15.37,3.94
  Bottom 0.178: R17.2 28.7,16.51 v28.83,16.64 | v16.64,16.26 16.51,16.13 16.51,15.68 16.44,15.61 16.44,5.01 v15.37,3.94
PC5  (via drill 0.25)
  Top 0.178: v28.96,14.99 28.91,15.04 v19.71,15.04 | v21.46,3.3 21.43,3.27 U1.58
  Bottom 0.178: v28.96,14.99 28.19,14.99 R18.2 | v21.46,3.3 21.34,3.3 19.75,4.89 19.75,15 v19.71,15.04
PC6  (via drill 0.25)
  Top 0.178: v28.96,14.22 18.14,14.22 v17.53,13.61 | v19.43,3.3 U1.54
  Bottom 0.178: R19.2 v28.96,14.22 | v17.53,13.61 17.53,7.3 17.89,6.94 17.89,5.09 19.43,3.56 v19.43,3.3
PC7  (via drill 0.25)
  Top 0.178: v28.83,12.7 v17.02,12.7 | U1.48 16.43,3.5 v16.38,3.56
  Bottom 0.178: R20.2 28.19,12.7 v28.83,12.7 | v16.38,3.56 16.9,4.08 16.9,12.59 v17.02,12.7
PC12  (1 unrouted)
PC14  (1 unrouted)
PC15  (via drill 0.25)
  Top 0.178: v28.83,8.13 28.45,7.75 22.46,7.75 22.33,7.87 21.92,7.87 21.59,7.54 19.57,7.54 19.38,7.73 18.46,7.73 18.27,7.54 v18.06,7.54 | v18.03,19.18 16.76,19.18 15.32,17.73 v10.39,17.73 | v10.41,12.95 10.28,12.82 U1.18
  Bottom 0.178: R33.2 v28.83,8.13 | v18.03,19.18 18.06,19.15 v18.06,7.54 | v10.39,17.73 10.03,17.37 10.03,15.98 10.58,15.44 10.58,13.12 v10.41,12.95
PC18  (via drill 0.25)
  Top 0.178: 27.43,23.37 U1.111 27.43,22.37 27.16,22.1 23.8,22.1 23.16,21.46 v22.66,21.46 | v28.81,11.91 23.33,11.91 v23.16,12.08
  Bottom 0.178: R37.2 28.58,11.68 v28.81,11.91 | v22.66,21.46 23.16,20.95 v23.16,12.08
PC20  (via drill 0.25)
  Top 0.178: v28.7,4.71 v28.71,4.7 24.51,4.7 v24.49,4.72 | v22.99,22.1 22.93,22.15 U1.120
  Bottom 0.178: R1.2 28.57,4.57 v28.7,4.71 | v24.49,4.72 24.49,9.46 23.66,10.29 23.66,21.42 v22.99,22.1
PC21  (via drill 0.25)
  Top 0.178: v21.93,21.97 U1.122 | v23.24,4.19 23.67,3.76 29.03,3.76 v29.13,3.66
  Bottom 0.178: v29.13,3.66 28.08,3.66 R2.2 | v21.93,21.97 22.11,21.8 22.11,11.59 22.62,11.09 22.62,6.79 22.48,6.65 22.48,5.24 23.24,4.47 v23.24,4.19
PC22  (via drill 0.25)
  Top 0.178: v20.95,21.97 20.95,23.17 U1.124 | v29.5,2.89 29.18,2.89 28.64,3.43 23.24,3.43 v23.16,3.5
  Bottom 0.178: R3.2 29.4,2.79 v29.5,2.89 | v23.16,3.5 23.11,3.5 21.61,5 21.61,21.31 v20.95,21.97
PC23  (via drill 0.25)
  Top 0.178: v29.46,1.91 28.79,2.58 28.79,2.79 28.57,3.01 22.96,3.01 22.54,3.43 22.35,3.43 | 22.35,3.43 v22.23,3.43 | 22.35,3.43 v22.22,3.43 | v19.43,21.72 U1.127
  Bottom 0.178: R4.2 v29.46,1.91 | v22.22,3.43 22.22,3.81 21.22,4.81 21.22,11.06 20.59,11.7 20.59,20.56 v19.43,21.72
PC24  (via drill 0.25)
  Top 0.178: U1.130 17.93,22.38 v17.53,21.97
  Bottom 0.178: R5.2 11.27,2.2 11.16,2.2 9.23,4.13 9.23,20.71 11.6,23.08 16.41,23.08 v17.53,21.97
PC25  (via drill 0.25)
  Top 0.178: v16.51,21.84 16.51,23.11 U1.133
  Bottom 0.178: R6.2 11.27,3.09 10.92,3.09 9.56,4.45 9.56,20.58 11.74,22.75 14.83,22.75 15.74,21.84 v16.51,21.84
PC26  (via drill 0.25)
  Top 0.178: U1.13 9.99,15.32 v10.08,15.23
  Bottom 0.178: v10.08,15.23 10.08,13.32 9.89,13.13 9.89,4.58 10.79,3.68 R7.2
PC27  (via drill 0.25)
  Top 0.178: v10.79,15.95 10.67,15.82 U1.12
  Bottom 0.178: 10.91,12.69 10.79,12.57 | 10.79,12.57 10.41,12.19 10.41,9.8 10.22,9.61 10.22,5.14 10.79,4.57 R8.2 | 10.79,12.57 10.79,12.63 10.91,12.75 10.91,15.1 | 10.91,15.1 10.92,15.11 | 10.91,15.1 10.91,15.84 v10.79,15.95
PC28  (via drill 0.25)
  Top 0.178: v10.92,5.46 12.18,6.72 15.89,6.72 16.77,5.84 21.59,5.84 22.21,5.22 29.16,5.22 29.26,5.32 U1.76
  Bottom 0.178: R9.2 v10.92,5.46
PC29  (via drill 0.25)
  Top 0.178: v10.92,11.43 10.92,13.46 10.56,13.82 U1.16
  Bottom 0.178: R10.2 11.04,6.35 10.55,6.83 10.55,9.48 10.78,9.71 10.78,11.29 v10.92,11.43
PC30  (via drill 0.25)
  Top 0.178: v28.83,5.71 v22.99,5.71 | U1.15 11.15,14.32 11.57,14.74 15.5,14.74 15.52,14.72 18.59,14.72 19.5,15.62 v22.61,15.62
  Bottom 0.178: R11.2 28.57,5.46 v28.83,5.71 | v22.61,15.62 22.61,11.56 22.95,11.22 22.95,5.75 v22.99,5.71
PC31  (via drill 0.25)
  Top 0.178: v11.05,7.37 17.54,7.37 17.85,7.05 18.27,7.05 18.45,7.24 v19.18,7.24 | v19.18,16 17.08,16 16.84,15.76 16.59,15.76 16.21,15.38 15.8,15.38 15.29,15.89 11.44,15.89 10.29,14.74 9.88,14.74 9.79,14.82 U1.14
  Bottom 0.178: R12.2 11.18,7.24 v11.05,7.37 | v19.18,7.24 v19.18,16
PD14  (via drill 0.25)
  Top 0.178: U1.84 24.94,9.32 24.51,8.89 21.97,8.89 21.46,8.38 v11.05,8.38
  Bottom 0.178: v11.05,8.38 R32.2
PD15  (via drill 0.25)
  Top 0.178: v11.68,10.92 v24.49,10.92 | U1.106 29.14,20.32 29.03,20.43 24.63,20.43 v24.49,20.57
  Bottom 0.178: R38.2 11.56,10.8 v11.68,10.92 | v24.49,10.92 v24.49,20.57
PD16  (via drill 0.25)
  Top 0.178: v28.88,8.79 28.12,8.79 27.58,8.26 v23.5,8.26 | U1.78 29.5,6.32 29.41,6.24 28.62,6.24 28.55,6.31 23.52,6.31 v23.5,6.29
  Bottom 0.178: v28.88,8.79 28.29,8.79 R34.2 | v23.5,8.26 v23.5,6.29
PD17  (via drill 0.25)
  Top 0.178: U1.74 29.38,4.32 29.24,4.19 24.24,4.19 v23.73,4.7 | v23.64,9.6 23.81,9.77 24.59,9.77 24.73,9.91 v28.96,9.91
  Bottom 0.178: v23.73,4.7 23.99,4.97 23.99,9.25 v23.64,9.6 | v28.96,9.91 R35.2
PD23  (via drill 0.25)
  Top 0.178: v11.05,9.27 19.94,9.27 v20.32,9.65 | U1.57 20.93,4.41 v20.34,5
  Bottom 0.178: R31.2 v11.05,9.27 | v20.34,5 20.36,5.02 20.36,6.12 20.12,6.36 20.12,9.47 20.32,9.67 v20.32,9.65
PD29  (via drill 0.25)
  Top 0.178: U1.108 24.47,21.32 v24.38,21.23 | v24.38,10.26 24.55,10.43 24.69,10.43 25.06,10.79 v28.83,10.79
  Bottom 0.178: v24.38,21.23 24.38,21.17 23.99,20.78 23.99,10.72 24.38,10.32 v24.38,10.26 | v28.83,10.79 R36.2
PE0  (via drill 0.25)
  Top 0.178: U1.4 10.23,19.82 10.87,20.46 11.25,20.46 11.5,20.21 11.91,20.21 13.03,21.32 18.66,21.32 19.32,20.66 20.99,20.66 v21.08,20.57 | v11.68,13.34 17.11,13.34 17.32,13.12 17.73,13.12 17.95,13.34 v21.08,13.34
  Bottom 0.178: R21.2 11.56,13.22 v11.68,13.34 | v21.08,13.34 v21.08,20.57
PE1  (via drill 0.25)
  Top 0.178: v16.93,14.06 16.87,13.99 v11.86,13.99 | U1.6 10.55,18.82 10.72,18.66 11.13,18.66 11.29,18.82 12.53,18.82 14.13,20.42 v15.47,20.42
  Bottom 0.178: v15.47,20.42 17.13,18.76 17.13,16.05 16.93,15.85 v16.93,14.06 | v11.86,13.99 11.86,14.06 R22.2
PE2  (via drill 0.25)
  Top 0.178: v17.54,15.32 17.46,15.39 16.69,15.39 16.34,15.05 15.66,15.05 15.32,15.39 v11.84,15.39 | v17.53,20.32 16.15,20.32 14.15,18.32 U1.7
  Bottom 0.178: v17.54,15.32 17.54,20.31 v17.53,20.32 | R23.2 11.69,15.24 v11.84,15.39
PE3  (via drill 0.25)
  Top 0.178: v10.7,17.14 10.4,16.85 9.09,16.85 U1.10
  Bottom 0.178: R24.2 11.18,16.64 10.7,17.12 v10.7,17.14
PE4  (via drill 0.25)
  Top 0.178: v9.27,22.1 9.69,21.68 9.9,21.68 10.39,21.19 v10.39,20.7 | v8,8.48 8.16,8.32 U1.27
  Bottom 0.178: R25.2 10.29,18.8 10.29,19.28 10.1,19.47 10.1,20.15 10.29,20.34 10.29,20.6 v10.39,20.7 | v9.27,22.1 9.18,22 9.18,21.69 8.57,21.09 8.57,9.05 v8,8.48
PE5  (via drill 0.25)
  Top 0.178: U1.28 8.27,7.82 8.21,7.76 7.86,7.76 v7.8,7.82 | v11.71,20.7 11.71,21.08 10.53,22.26 10.53,22.43 10.24,22.72 10.07,22.72 v9.91,22.89
  Bottom 0.178: R26.2 11.34,19.15 10.88,19.15 10.43,19.61 10.43,20.02 10.81,20.4 11.41,20.4 v11.71,20.7 | v7.8,7.82 7.73,7.82 7.51,8.05 7.51,8.7 8.13,9.32 8.13,21.66 9.32,22.85 9.87,22.85 v9.91,22.89
RAS
  Bottom 0.178: IC1.18 26.03,8.62 26.18,8.76 26.8,8.76 R34.1
RFU_9  (via drill 0.25)
  Top 0.152: J1.9 v3.3,24.09
  Bottom 0.152: J2.9 v3.3,24.09
RFU_11  (via drill 0.25)
  Top 0.152: J1.11 v3.3,23.29
  Bottom 0.152: J2.11 v3.3,23.29
RFU_13  (via drill 0.25)
  Top 0.152: J1.13 v3.3,22.48
  Bottom 0.152: J2.13 v3.3,22.48
RFU_15  (via drill 0.25)
  Top 0.152: J1.15 v3.3,21.68
  Bottom 0.152: J2.15 v3.3,21.68
RFU_17  (via drill 0.25)
  Top 0.152: J1.17 v3.3,20.89
  Bottom 0.152: J2.17 v3.3,20.89
RFU_19  (via drill 0.25)
  Top 0.152: J1.19 v3.3,20.09
  Bottom 0.152: J2.19 v3.3,20.09
RFU_21  (via drill 0.25)
  Top 0.152: J1.21 v3.3,19.29
  Bottom 0.152: J2.21 v3.3,19.29
RFU_23  (via drill 0.25)
  Top 0.152: J1.23 v3.3,18.48
  Bottom 0.152: J2.23 v3.3,18.48
RFU_25  (via drill 0.25)
  Top 0.152: J1.25 v3.3,17.68
  Bottom 0.152: J2.25 v3.3,17.68
RFU_27  (via drill 0.25)
  Top 0.152: J1.27 v3.3,16.89
  Bottom 0.152: J2.27 v3.3,16.89
RFU_29  (via drill 0.25)
  Top 0.152: J1.29 v3.3,16.09
  Bottom 0.152: J2.29 v3.3,16.09
RFU_31  (via drill 0.25)
  Top 0.152: J1.31 v3.3,15.29
  Bottom 0.152: J2.31 v3.3,15.29
RFU_33  (via drill 0.25)
  Top 0.152: J1.33 v3.3,14.48
  Bottom 0.152: J2.33 v3.3,14.48
RFU_35  (via drill 0.25)
  Top 0.152: J1.35 v3.3,13.69
  Bottom 0.152: J2.35 v3.3,13.69
RFU_37  (via drill 0.25)
  Top 0.152: J1.37 v3.3,12.88
  Bottom 0.152: J2.37 v3.3,12.88
RS485_D+  (via drill 0.25)
  Top 0.152: v4.9,17.68 J1.26
  Bottom 0.152: J2.26 v4.9,17.68
RS485_D-  (via drill 0.25)
  Top 0.152: v4.9,16.89 J1.28
  Bottom 0.152: J2.28 v4.9,16.89
SCL0_1V8  (2 unrouted)
SDA0_1V8  (2 unrouted)
SDWE
  Bottom 0.178: IC1.16 26.06,10.31 26.87,10.62 R36.1
SHIELD  (via drill 0.25)  (9 unrouted)
  Top 0.152: J1.1 v3.3,27.29 | v4.9,12.09 J1.40 | J1.39 v3.3,12.09 | v4.9,16.09 J1.30 | v4.9,18.48 J1.24 | v4.9,20.89 J1.18 | v4.9,24.89 J1.8 | v4.9,27.29 J1.2
  Bottom 0.152: J2.1 v3.3,27.29 | J2.40 6.1,12.09 | 6.1,12.09 v4.9,12.09 | J2.39 v3.3,12.09 | J2.30 v4.9,16.09 | J2.24 v4.9,18.48 | J2.18 v4.9,20.89 | J2.8 v4.9,24.89 | J2.2 v4.9,27.29 | R89999.1 4.95,8.38 6.1,9.53 6.1,12.09
  pour Bottom (rank 4): 0,30.61 7.24,30.61 7.24,8.76 0,8.76
  pour Top (rank 4): 7.24,30.61 0,30.61 0,8.76 7.24,8.76
SPI_MISO  (via drill 0.25)
  Top 0.152: v4.9,23.29 J1.12
  Bottom 0.152: J2.12 v4.9,23.29
SPI_MOSI  (via drill 0.25)
  Top 0.152: v4.9,22.48 J1.14
  Bottom 0.152: J2.14 v4.9,22.48
SPI_SCK  (via drill 0.25)
  Top 0.152: v4.9,21.68 J1.16
  Bottom 0.152: J2.16 v4.9,21.68
VDDOUT  (10 unrouted)
  Top 0.305: U1.29 8.09,7.32 8.03,7.26 7.1,7.26 C3.1
  Top 0.356: U1.107 31.12,20.83 31.37,21.07 31.37,21.57 30.73,22.21 C7.1 | C6.1 31.56,7.82 U1.81 | C4.1 7.5,5.32 U1.33 | U1.50 17.43,1.14 17.68,0.89 28.36,0.89 28.44,0.81 30.64,0.81 C5.1
VDDPLL  (2 unrouted)
VDDPLLUSB  (2 unrouted)